# EAGLE board Universalregister_1.1 (EAGLE 7.6.0)
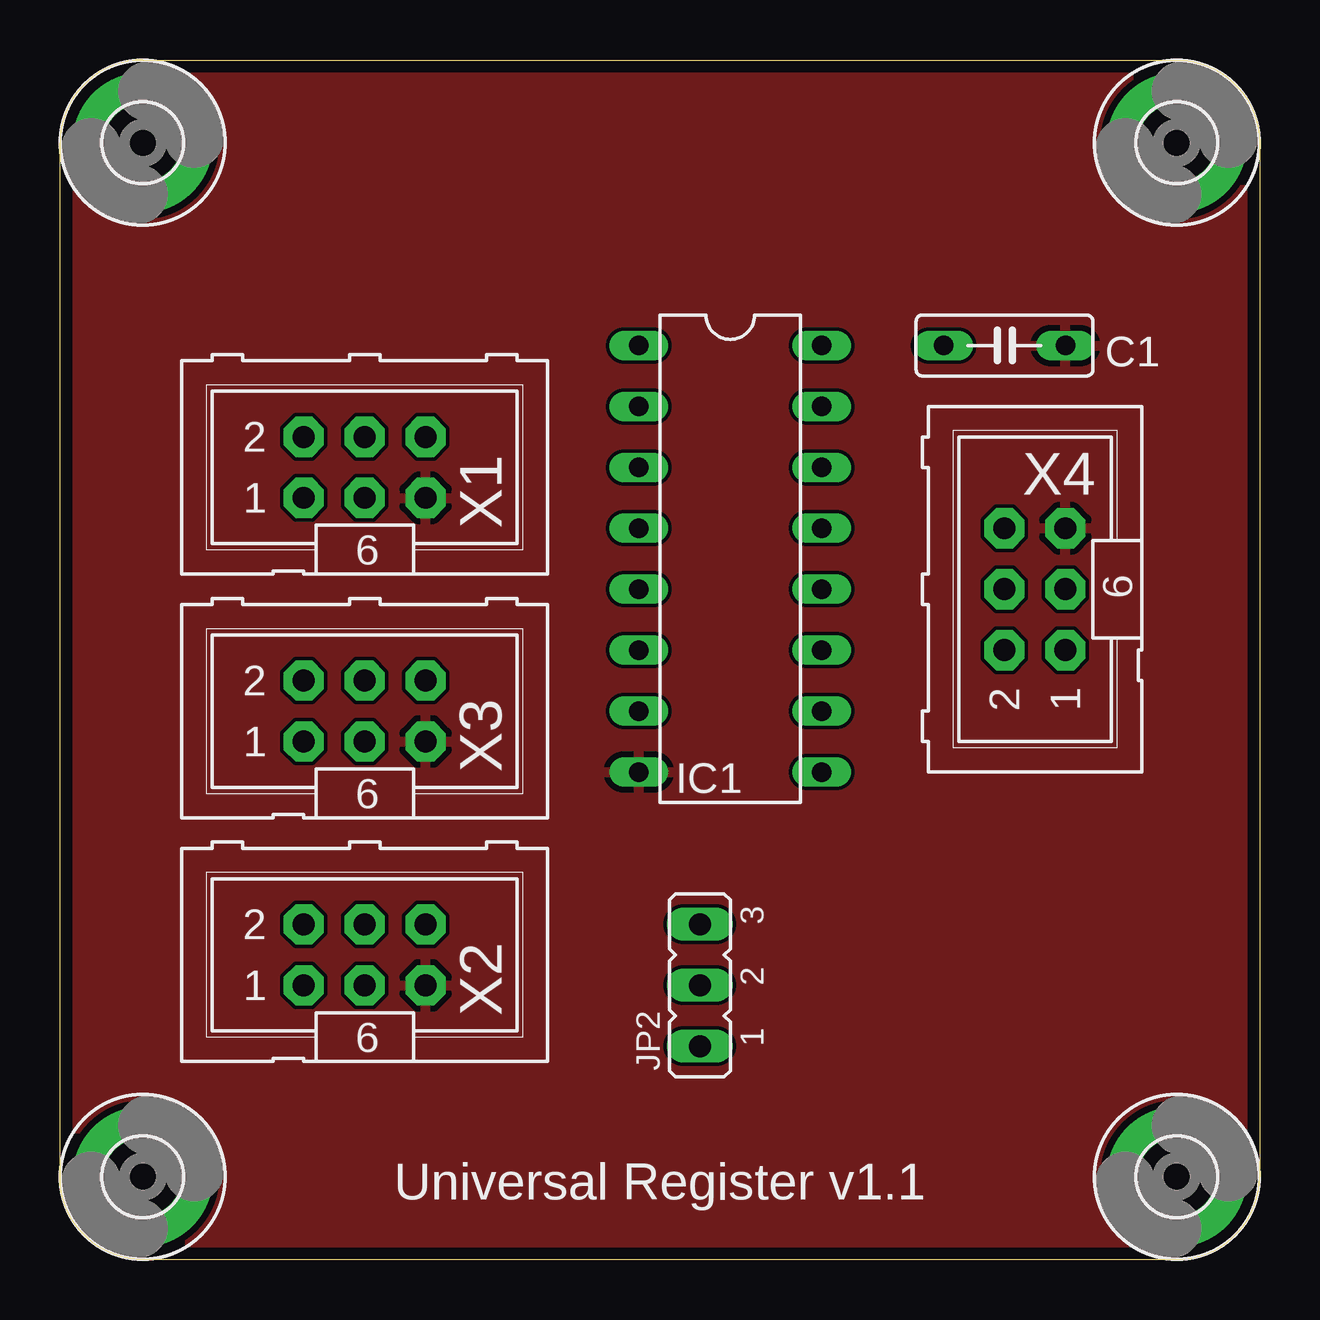
[diagram p0: board, top side]
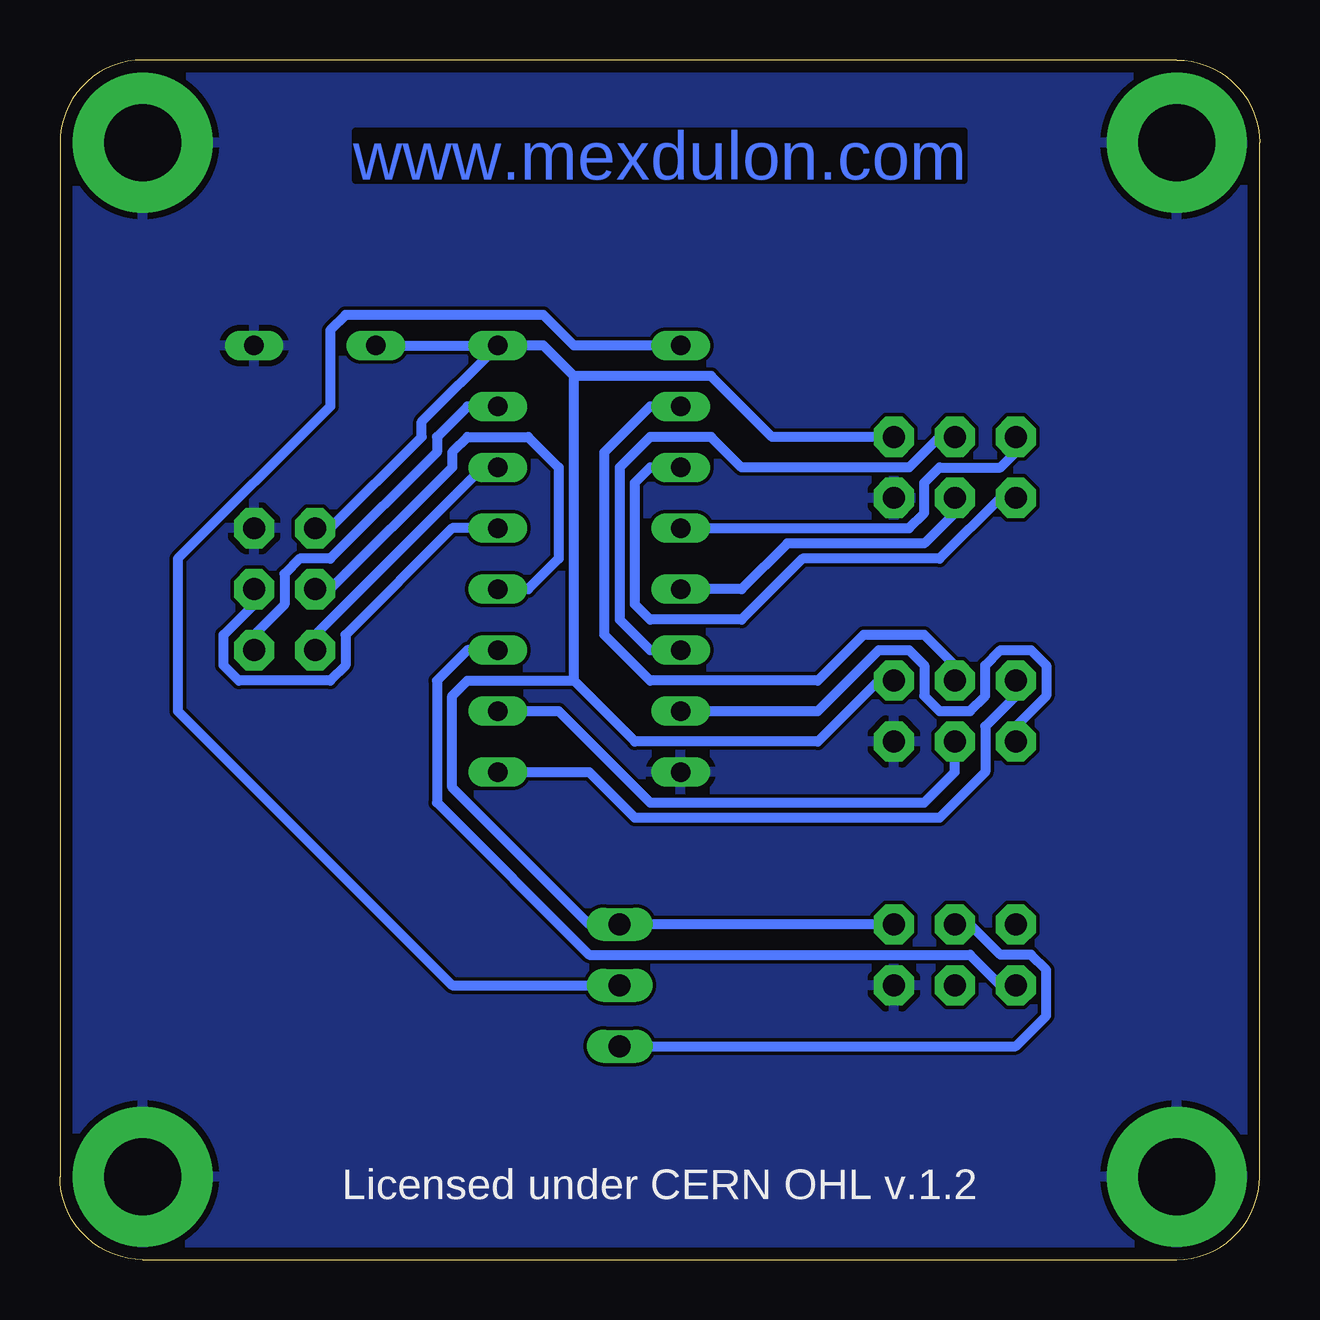
[diagram p1: board, bottom side, seen from below]

Size 50 x 50 mm. Coordinates in mm from the lower left corner, seen from the top.
Outline: 0,3.45 0,46.55 arc-90 3.45,50 46.55,50 arc-90 50,46.55 50,3.45 arc-90 46.55,0 3.45,0 arc-90 0,3.45
Copper layers (1*16): Top 0.035mm / dielectric 1.6mm / Bottom 0.035mm
Design rules "Elecrow_2-layer_PCB_eagle_rule": minimum track width 6mil, minimum drill 12mil, track to track 6mil, track to pad 6mil, pad to pad 6mil, via to via 8mil, smd to smd 0mil, copper to edge 20mil, drill to drill 10mil, minimum pad ring 6mil, minimum via ring 6mil, stop-mask expansion 0mil, vias tented up to drill 100mil, thermal gap 10mil

## Footprints (pad centres in the part's own frame; a part is rotated, then mirrored left to right if it is on the bottom)
C050-025X075 = drill 0.813 long: 1 -2.54,0; 2 2.54,0
3,2-PAD = drill 3.2 pad 5.842: B3,2 0,0
DIL16 = drill 0.813 long: 1 -8.89,-3.81; 2 -6.35,-3.81; 3 -3.81,-3.81; 4 -1.27,-3.81; 5 1.27,-3.81; 6 3.81,-3.81; 7 6.35,-3.81; 8 8.89,-3.81; 9 8.89,3.81; 10 6.35,3.81; 11 3.81,3.81; 12 1.27,3.81; 13 -1.27,3.81; 14 -3.81,3.81; 15 -6.35,3.81; 16 -8.89,3.81
JP2 = drill 0.914 long: 1 -2.54,0; 2 0,0; 3 2.54,0
ML-6 = drill 0.914 pad 1.676 octagon: 1 -2.54,-1.27; 2 -2.54,1.27; 3 0,-1.27; 4 0,1.27; 5 2.54,-1.27; 6 2.54,1.27

## Placement (x,y rotation side)
C1  100n  [C050-025X075]  39.37,38.1 0 top
H1  MOUNT-PAD-ROUND3.2  [3,2-PAD]  3.45,3.45 0 top
H2  MOUNT-PAD-ROUND3.2  [3,2-PAD]  3.45,46.55 0 top
H3  MOUNT-PAD-ROUND3.2  [3,2-PAD]  46.55,46.55 0 top
H4  MOUNT-PAD-ROUND3.2  [3,2-PAD]  46.55,3.45 0 top
IC1  74HC194N  [DIL16]  27.94,29.21 270 top
JP2  /CLR 4/H  [JP2]  26.67,11.43 90 top
X1  In  [ML-6]  12.7,33.02 0 top
X2  Ctrl  [ML-6]  12.7,12.7 0 top
X3  Mode  [ML-6]  12.7,22.86 0 top
X4  Out  [ML-6]  40.64,27.94 90 top

## Library data of the parts
C1 = 01-my_rcl
H1-H4 = holes
IC1 = 74xx-eu
JP2 = jumper
X1-X4 = 01-my-con

## Nets
GND: C1.2 H1.B3,2 H2.B3,2 H3.B3,2 H4.B3,2 IC1.8 X1.5 X2.5 X3.5 X4.5
N$1: IC1.3 X1.1
N$2: IC1.4 X1.2
N$3: IC1.5 X1.3
N$4: IC1.6 X1.4
N$5: IC1.11 X2.1
N$6: IC1.1 JP2.2
N$7: IC1.15 X4.1
N$8: IC1.14 X4.2
N$9: IC1.13 X4.3
N$10: IC1.12 X4.4
N$11: IC1.9 X3.2
N$12: IC1.2 X3.4
N$15: JP2.1 X2.4
N$16: IC1.10 X3.3
N$17: IC1.7 X3.1
VCC: C1.1 IC1.16 JP2.3 X1.6 X2.6 X3.6 X4.6

## Tracks (layer width: path | path; a pad name or v marks a point on that pad's centre or on a via)
GND
  pour Bottom: 0,50.16 50.16,50.16 50.16,0 0,0
  pour Top: 0,50.16 50.16,50.16 50.16,0 0,0
N$1
  Bottom 0.406: X1.1 10.79,31.75 13.34,29.21 19.05,29.21 21.59,26.67 25.4,26.67 26.04,27.3 26.04,32.38 25.4,33.02 IC1.3
N$2
  Bottom 0.406: IC1.4 14.61,30.48 13.97,31.11 13.97,32.38 13.34,33.02 10.79,33.02 10.16,33.66 X1.2
N$3
  Bottom 0.406: X1.3 12.7,31.11 13.97,29.84 19.68,29.84 21.59,27.94 IC1.5
N$4
  Bottom 0.406: X1.4 13.34,34.29 14.61,33.02 21.59,33.02 22.86,34.29 25.4,34.29 26.67,33.02 26.67,26.67 25.4,25.4 IC1.6
N$5
  Bottom 0.406: IC1.11 33.02,25.4 34.29,24.13 34.29,19.05 27.94,12.7 12.06,12.7 10.79,11.43 X2.1
N$6
  Bottom 0.406: IC1.1 28.57,38.1 29.84,39.37 38.1,39.37 38.73,38.73 38.73,35.56 45.09,29.21 45.09,22.86 33.66,11.43 JP2.2
N$7
  Bottom 0.406: X4.1 41.91,26.04 40.64,27.3 40.64,28.57 40.01,29.21 38.73,29.21 34.29,33.66 34.29,34.29 33.02,35.56 IC1.15
N$8
  Bottom 0.406: IC1.14 32.38,33.02 39.37,26.04 X4.2
N$9
  Bottom 0.406: IC1.13 33.66,30.48 38.1,26.04 38.1,24.77 38.73,24.13 42.55,24.13 43.18,24.77 43.18,26.04 41.91,27.3 X4.3
N$10
  Bottom 0.406: X4.4 38.73,27.94 33.66,33.02 33.66,33.66 33.02,34.29 30.48,34.29 29.21,33.02 29.21,29.21 30.48,27.94 IC1.12
N$11
  Bottom 0.406: X3.2 10.16,23.5 11.43,22.23 11.43,20.32 13.34,18.41 26.04,18.41 27.94,20.32 IC1.9
N$12
  Bottom 0.406: X3.4 12.7,24.77 13.97,26.04 16.51,26.04 18.41,24.13 25.4,24.13 27.3,26.04 27.3,33.66 25.4,35.56 IC1.2
N$15
  Bottom 0.406: JP2.1 10.16,8.89 8.89,10.16 8.89,12.06 9.53,12.7 10.79,12.7 12.06,13.97 X2.4
N$16
  Bottom 0.406: IC1.10 29.21,22.86 25.4,19.05 13.97,19.05 12.7,20.32 X3.3
N$17
  Bottom 0.406: IC1.7 18.41,22.86 15.88,25.4 14.61,25.4 13.97,24.77 13.97,23.5 13.34,22.86 12.06,22.86 11.43,23.5 11.43,24.77 10.79,25.4 9.53,25.4 8.89,24.77 8.89,23.5 10.16,22.23 X3.1
VCC
  Bottom 0.406: X1.6 20.32,34.29 22.86,36.83 28.57,36.83 | C1.1 IC1.16 | X4.6 38.73,30.48 34.92,34.29 34.92,34.92 IC1.16 | 28.57,36.83 29.84,38.1 IC1.16 | X2.6 JP2.3 27.94,13.97 33.66,19.68 33.66,23.5 33.02,24.13 28.57,24.13 | 28.57,24.13 28.57,36.83 | X3.6 15.88,24.13 18.41,21.59 26.04,21.59 28.57,24.13

## Text on the board
Bottom: www.mexdulon.com
tNames: Universal Register v1.1
bNames: Licensed under CERN OHL v.1.2
tValues: Mode / 1: SR / 2: S0 / 3: S1 / 4: SL | S1 S0 Function / L L Save / L H Shift L / H L Shift R / H H Load